# Altium PCB OLDFC_Ver_0_2.PcbDoc
Units mm, origin at the board's own origin, x right, y up, seen from the top; angles counter-clockwise.
Board outline 82 x 58 mm, 2 copper layers (Top Layer, Bottom Layer); 26 components, 24 nets, 116 pads, 23 vias.
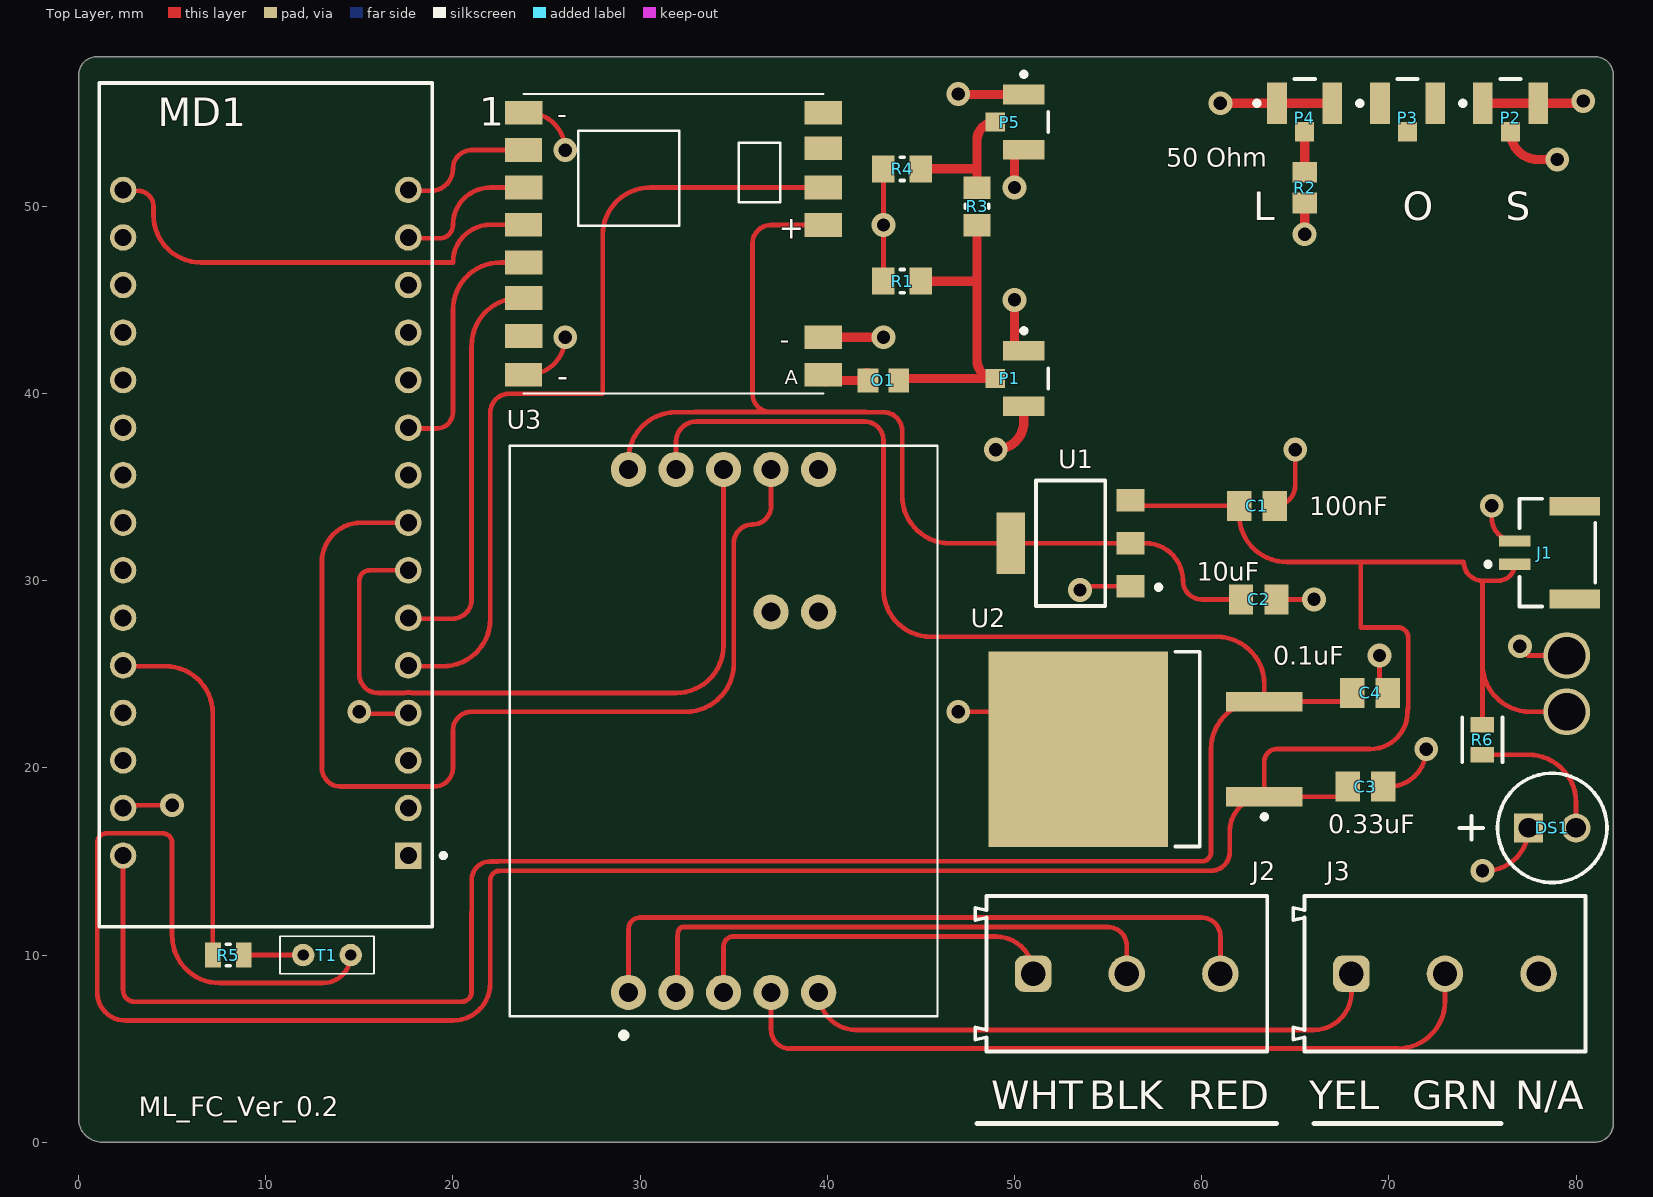
[diagram p0: Top Layer view]
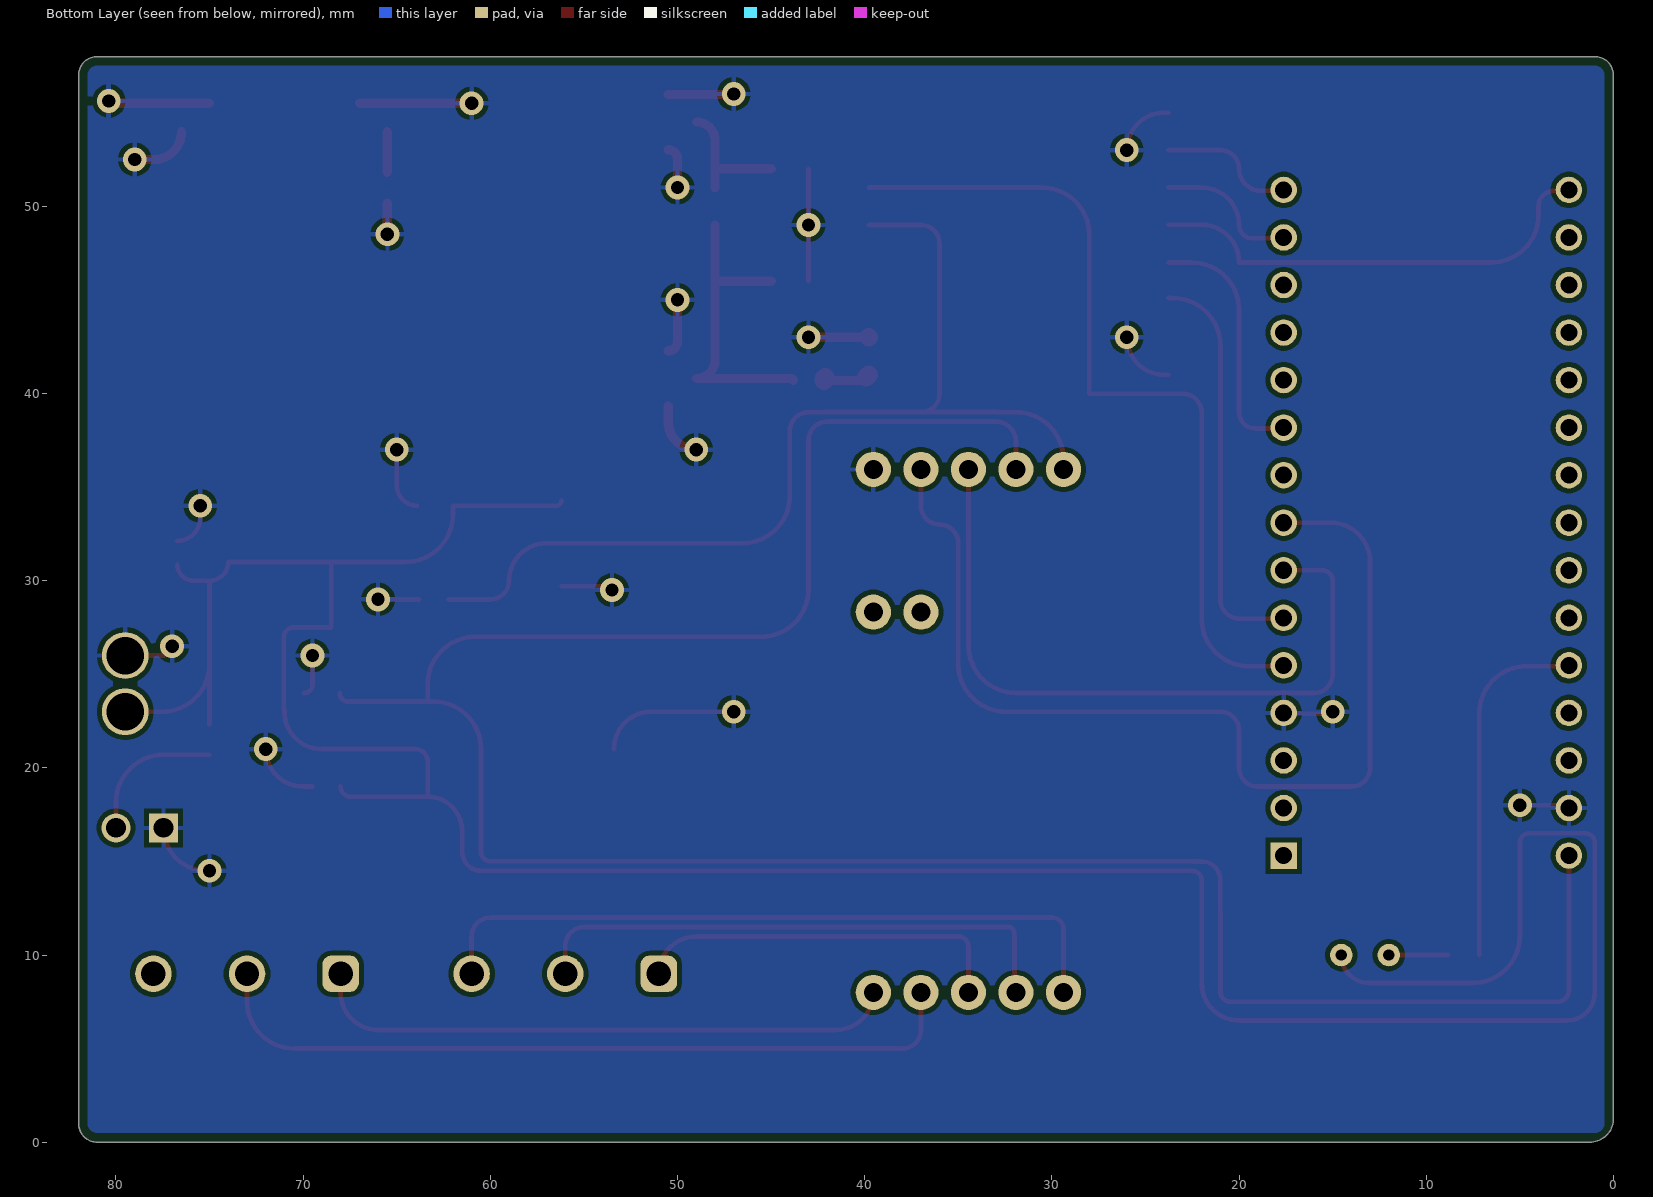
[diagram p1: Bottom Layer view, seen from below]

## Layer stack, top to bottom
Top Solder: solder mask 0.0102, Solder Resist, Dk 3.5
Top Layer: signal copper 0.0356
Dielectric 1: dielectric 0.32, FR-4, Dk 4.8
Bottom Layer: signal copper 0.0356
Bottom Solder: solder mask 0.0102, Solder Resist, Dk 3.5

## Board outline
1.27,0 cw(c1.27,1.27) 0,1.27 0,57 cw(c1,57) 1,58 81,58 cw(c81,57) 82,57 82,1 cw(c81,1) 81,0

## Design rules (kind name [scope] priority, off if disabled: settings)
Clearance [All] p1: gap=0.254 ignorepadtopadclearanceinfootprint=FALSE
MinimumSolderMaskSliver [All] p1: minsoldermaskwidth=0.2
PolygonConnect [All] p1: connectstyle=Relief reliefconductorwidth=0.254 reliefentries=4 polygonreliefangle="90 Angle" airgapwidth=0.254
RoutingVias [All] p1: holewidth=0.711 width=1.27 viastyle="Through Hole" minholewidth=0.711 minwidth=1.27 maxholewidth=0.711 maxwidth=1.27
SolderMaskExpansion [All] p1: expansion=0.102 istentingtop=FALSE
SupplyNets "Schematic Supply Nets" [InNet('GND')] p1: voltage=0.000
SupplyNets "Schematic Supply Nets_3" [InNet('+3.3v')] p2: voltage=0.000
SupplyNets "Schematic Supply Nets_2" [InNet('+12')] p3: voltage=0.000
SupplyNets "Schematic Supply Nets_1" [InNet('+5v')] p4: voltage=0.000
Width [All] p1: maxlimit=1 minlimit=0.254 preferedwidth=0.254 bottomlayer_maxwidth=0.254 minimp=50.000000 maximp=50.000000 favimp=50.000000
29 further rules are at their usual default settings.

## Components (designator, comment, footprint, x,y, rotation, side; value= is the part's Value field where it differs from the comment)
1 "_C2H_RFM95" _C2H_RFM95 34,48 r0 top
C1 "100nF" RCL_M0805 62.95,34 r180 top
C2 "10uF" RCL_M0805 63.05,29 r180 top
C3 "0.33uF" RCL_M0805 68.75,19 r0 top
C4 "0.1uF" RCL_M0805 69,24 r0 top
DS1 "HLMP-3301" AVAG-HLMP-3301-2 77.46,16.792 r0 top
J1 "SM02B-GHS-TB(LF)(SN)" FP-SM02B-GHS-TB_LF_SN-MFG 79,31.5 r90 top
J2 "691213710003" 691213710003 56,9 r0 top
J3 "691213710003" 691213710003 73,9 r0 top
MD1 "A000005" FP-A000005-MFG 10,34.047 r180 top
O1 "0805" RESC2012X06N 43,40.696 r180 top
P1 "U.FL-R-SMT-1(01)" HRS-U.FL-R-SMT-3_V 50.5,40.8 r270 top
P2 "Short" HRS-U.FL-R-SMT-3_V 76.5,55.5 r0 top
P3 "Open" HRS-U.FL-R-SMT-3_V 71,55.5 r0 top
P4 "Load" HRS-U.FL-R-SMT-3_V 65.5,55.5 r0 top
P5 "U.FL-R-SMT-1(01)" HRS-U.FL-R-SMT-3_V 50.5,54.5 r270 top
R1 "RC0805FR-071KL" RESC2013X60X35ML10T20 44,46 r180 top
R2 "0805" RESC2012X06N 65.5,51 r90 top
R3 "RC0805FR-071KL" RESC2013X60X35ML10T20 48,49.996 r270 top
R4 "RC0805FR-071KL" RESC2013X60X35ML10T20 44,52 r0 top
R5 "CRCW08050000Z0EA" RESC2013X50X30LL20T20 8,10 r0 top
R6 "RC0805FR-07100KL" FP-RC0805-0_6-IPC_C 75,21.5 r270 top
T1 "GenericTH" "Generic Two Pin Connector" 14.54,10 r180 top
U1 "LD1117S33CTR" FP-SOT-223-0046067_14-MFG 53,32 r180 top
U2 "L7805CD2T-TR" TO-263_M 57,21 r180 top
U3 "SEN-13879" SPARKFUN_SEN-13879 34.46,21.97 r90 top

## Footprints (in the part's own frame and the unit in brackets; to place one, negate y for a bottom-side part, rotate by r counter-clockwise, add the part's x,y. Pads: shape width x height; smd on the part's side, far side on the other; paste and mask are expansions set on the pad)
691213710003 [mm] "5,00mm - modular - green - Horizontal entry with rising cage clamp -  10,0mm height - 03p"
  rrect50% 1.95x1.95 hole 1.3: 1(-5,0)
  round 1.95 hole 1.3: 2(0,0) 3(5,0)
  silkscreen extent -8.1,-4.15 7.5,4.15, body extent -8.1,-4.15 7.5,4.15, height 10.05
_C2H_RFM95 [mm]
  rect 2x1.27 smd: ANT(5.777,-7) DIO0(5.777,3) DIO1(5.78,5.095) DIO2(5.78,7) DIO5(-10.225,-4.936) GND(5.777,-5) GND1(-10.222,7) GND2(-10.23,-7) MISO(-10.23,5) MOSI(-10.225,3) NSS(-10.222,-1) RST(-10.222,-2.905) SCK(-10.23,1.012) VDD(5.777,1)
  silkscreen extent -10.23,-8 5.78,8
AVAG-HLMP-3301-2 [mm] "THD, 2-Leads, Body Dia 5.85mm"
  rect 1.55x1.55 hole 1.05: 1(0,0)
  round 1.55 hole 1.05: 2(2.54,0)
  silkscreen extent -3.68,-2.92 4.19,2.92
FP-A000005-MFG [mil]
  rect 55.67x55.67 hole 35.98 paste-99999 mask+0: 1(-300,737.5)
  round 55.67 hole 35.98 paste-99999 mask+0: 2(-300,637.5) 3(-300,537.5) 4(-300,437.5) 5(-300,337.5) 6(-300,237.5) 7(-300,137.5) 8(-300,37.5) 9(-300,-62.5) 10(-300,-162.5) 11(-300,-262.5) 12(-300,-362.5) 13(-300,-462.5) 14(-300,-562.5) 15(-300,-662.5) 16(300,-662.5) 17(300,-562.5) 18(300,-462.5) 19(300,-362.5) 20(300,-262.5) 21(300,-162.5) 22(300,-62.5) 23(300,37.5) 24(300,137.5) 25(300,237.5) 26(300,337.5) 27(300,437.5) 28(300,537.5) 29(300,637.5) 30(300,737.5)
  silkscreen extent -379,-888 350,888, body extent -354,-891 354,891, height 10
FP-RC0805-0_6-IPC_C [mm]
  rect 0.808x1.262 smd paste+0 mask+0: 1(-0.802,0) 2(0.802,0)
  silkscreen extent -1.21,-1.07 1.21,1.07, body extent -1.31,-0.77 1.31,0.77, height 0.25
FP-SM02B-GHS-TB_LF_SN-MFG [mm]
  rect 0.6x1.7 smd paste+0 mask+0: 1(-0.625,2.275) 2(0.625,2.275)
  rect 1x2.7 smd paste+0 mask+0: 3(-2.475,-0.925) 4(2.475,-0.925)
  silkscreen extent -2.88,-2.02 2.88,3.82, body extent -3.08,-2.37 3.08,3.22, height 0.25
FP-SOT-223-0046067_14-MFG [mm]
  rect 1.5x1.2 smd paste+0 mask+0: 1(-3.2,2.3) 2(-3.2,0) 3(-3.2,-2.3)
  rect 1.5x3.3 smd paste+0 mask+0: 4(3.2,0)
  silkscreen extent -4.83,-3.35 1.85,3.35, body extent -4.05,-3.45 4.05,3.45, height 0.25
"Generic Two Pin Connector" [mm]
  round 1.2 hole 0.6: 1(0,0) 2(2.54,0)
  silkscreen extent -1.23,-1 3.77,1
HRS-U.FL-R-SMT-3_V [mm] "SMT, 3-Leads, Body 2.6x2.6mm"
  rect 1.05x2.2 smd: 1(-1.475,0) 2(1.475,0)
  rect 1x1.05 smd: 3(0,-1.525)
  silkscreen extent -2.67,-0.12 0.55,1.3, body extent -1.3,-1.3 1.3,1.3, height 1.25
RCL_M0805 [mm]
  rect 1.3x1.6 smd: 1(-0.95,0) 2(0.95,0)
RESC2012X06N [mm] "Chip Resistor, 2-Leads, Body 2.00x1.25mm, IPC Medium Density"
  rect 1.1x1.3 smd: 1(-0.825,0) 2(0.825,0)
  body extent -1,-0.63 1,0.63, height 0.6
RESC2013X50X30LL20T20 [mm] "Chip Resistor, 2-Leads, Body 2.00x1.25mm, IPC High Density"
  rect 0.85x1.35 smd: 1(-0.825,0) 2(0.825,0)
  silkscreen extent -0.1,-0.58 0.1,0.58, body extent -1.1,-0.72 1.1,0.72, height 0.5
RESC2013X60X35ML10T20 [mm] "Chip Resistor, 2-Leads, Body 2.1x1.35mm, IPC Low Density"
  rect 1.2x1.45 smd: 1(-1,0) 2(1,0)
  silkscreen extent -0.1,-0.63 0.1,0.63, body extent -1.05,-0.68 1.05,0.67, height 0.6
SPARKFUN_SEN-13879 [mil]
  round 74 hole 40: 1(-550,200) 2(-550,100) 3(-550,0) 4(-550,-100) 5(-550,-200) 6(550,-200) 7(550,-100) 8(550,0) 9(550,100) 10(550,200) 11(250,-100) 12(250,-200)
  silkscreen extent -646,-450 600,450
TO-263_M [mm] "D2-PAK, 4-Leads, Body 9.2x10.2mm, Pitch 2.54mm, Lead Span 15.4mm, IPC Low Density"
  rect 4.1x1.05 smd: 1(-6.35,2.54) 3(-6.35,-2.54)
  rect 9.6x10.45 smd: 4(3.6,0)
  silkscreen extent -6.48,-5.2 -1.6,5.2, body extent -2.9,-5.2 6.45,5.2, height 4.6

## Part data
C1 C2 C3 C4: library part RCL_R-EU_M0805, Package=RCL_M0805, DeviceName=M0805, DeviceSetName=RCL_R-EU_, GateName_1=G$1, LibraryName=AmbaSat-1v1-01-NO-solar, SymbolName_1=RCL_R-EU
DS1: library part CMP-2000-06411-1, "T-1 3/4 (5 mm) Diffused LED Lamp, 1.9 V, -40 to 100 degC, 2-Pin THD, RoHS, Bulk", Emitting Color=Red, Forward Current=25mA, Forward Voltage=2.4V, Manufacturer=Avago, Operating Temp Range=-40Cto100C, Operating Temperature Classification=Industrial, Package Description="2-Pin Through Hole LED, Dia 5.85 mm", Package Type=T-13/4, Power Dissipation=85W, Reverse Voltage=5V, Test Current (It)=10mA, Chip Material=GaP, Datasheet URL=http://www.avagotech.com/docs/AV02-1558EN, Datasheet Version=03/2015, DELETED=Compliant, Dominant Wave Length=626nm, High Brightness=No, Lens Dimensions=5.08x5.08x8.3mm, Lens Type=ColoredDiffused, Lum Intensity=5.4mcd, Luminous Intensity=5.4mcd, Main Category=StandardLED, Manufacturer URL=http://www.avagotech.com/, Mounting=ThroughHole, Mounting Technology=ThroughHole, Number of  Elements=1, Package Reference=HLMP-3301, Packaging=TapeandReel, Peak Wavelength=635nm, Pin Count=2, Product Depth (mm)=6.1mm, Product Height (mm)=9.19mm, Product Length (mm)=6.1mm, Rad Hardened=No, Shape Type=Circular, Type=Uni-Color, Viewing Angle=60deg
J1: library part CMP-2000-07076-2, "CONN HEADER SMD R/A 2POS 1.25MM", Color=Natural, Current Rating=1A, Package Quantity=2500, Voltage Rating=50V, Connector Type="Outer Shroud Contact", Contact Material=Bronze, Contact Plating=Tin, Contact Type="Male Pin", Fastening Type=Latch, Housing Color=Natural, Housing Material=Nylon, Lead Free="Lead Free", Mount="Surface Mount", Number of Contacts=2, Number of Positions=2, Number of Rows=1, Orientation="Right Angle", Packaging="Tape and Reel", Pitch=0.049inch, Series=GH, Termination=Solder
J2 J3: library part CMP-1502-02527-2, Color=Green, Current=10A, Max Operating Temperature=105°C, Min Operating Temperature=-40°C, Voltage=300V, Connector Type="PCB, Terminal Block", Contact Material=Brass, Contact Plating=Tin, Height=10mm, Housing Material=Nylon, Lead Pitch=5mm, Length=8.3mm, Mount="Through Hole", NexarPartId=8917719, Number of Contacts=3, Number of Levels=1, Number of Pins=3, Number of Positions Per Level=3, Packaging=Box, Pitch=5.0038mm, Plating="Brass, Steel", REACH SVHC=Unknown, RoHS=Compliant, Stripping Length=-7mm, Termination=Screw, Width=15.6mm, Wire Gauge (Max)=26AWG, Wire Gauge (Min)=16AWG, Wire/Cable Gauge=16AWG
MD1: library part CMP-189986-000002-1, "ARDUINO NANO ATMEGA328 EVAL BRD", Operating Supply Voltage=12V, Package Quantity=50, Core Architecture=AVR, Data Bus Width=8b, Evaluation Kit=Yes, Height=0.25inch, Interface=I2C, Length=7inch, Number of Bits=8, Packaging=Bulk, REACH SVHC="No SVHC", Series="AVR® ATmega", Weight=0.358383oz, Width=5inch
P1 P2 P3 P4 P5: library part CMP-2000-05153-1, "Ultra Small Coaxial Connector, 6 GHz, -40 to 90 degC, 3-Pin SMD, RoHS, Bulk", Dielectric Material=LiquidCrystalPolymer(LCP), Frequency - Max=6GHz, Housing Color=Silver, Manufacturer="Hirose Electric", Operating Temperature=-40degC~90degC, Package Description="3-Pin Surface Mount Device, Body 2.6 x 2.6 mm", Package Reference=U.FL-R-SMT, Standard Package=100, Body Finish=Silver, Body Material=PhosphorBronze, Category=Connectors,Interconnects, Center Contact Material=PhosphorBronze, Center Contact Plating=Gold, Connector Style=U.FL, Connector Type=Jack,MalePin, Contact Termination=Solder, Datasheet URL=https://datasheet.ciiva.com/26945/getdatasheetpartid-475239-26945414.pdf, Datasheet Version=Feb-09, Dynamic Catalog=U.FLSeries, Family=CoaxialConnectors(RF), Fastening Type=Snap-On, Featured Product=HiroseU.FLSeries, Impedance=50Ohm, Manufacturer URL=https://www.hirose.com, Minimum Quantity=UltraMiniatureCoaxial, Mounting Type=SurfaceMount, Online Catalog=U.FLSeries, Other Names="H122041 / U.FL-R-SMT-1(01)-ND", Packaging=Bulk, Quantity Available=Bulk, Series=U.FL, Shield Termination=Solder, Unit PriceUSD=U.FL
R1 R3 R4: library part CMP-2100-03671-1, "Chip Resistor, 1 KOhm, +/- 1%, 125 mW, -55 to 155 degC, 0805 (2012 Metric), RoHS, Tape and Reel", Case Code (Imperial)=0805, Case Code (Metric)=2012, Manufacturer=Yageo, Max Operating Temperature=155degC, Max Power Dissipation=125mW, Min Operating Temperature=-55degC, Package Description="2-Pin Surface Mounted Device, Body 2 x 1.25 mm", Package Quantity=1, Resistance=1KOhm, Temperature Coefficient=100ppm/degreesC, Tolerance=1%, Voltage Rating=150V, Case/Package=0805, Composition=ThickFilm, Datasheet URL=http://www.yageo.com/NewPortal/yageodocoutput?fileName=/pdf/R-Chip/PYu-RC_Group_51_RoHS_L_5.pdf, Datasheet Version="Rev. 5, 10/2016", Depth=1.25mm, Height=0.024inch, Lead Free=LeadFree, Length=0.079inch, Manufacturer URL=http://www.yageo.com/, Military Standard=Not, Number of Pins=2, Number of Terminations=2, Package Reference=0805, Packaging=TapeandReel, Power Rating=125mW, REACH SVHC=Unknown, RoHSCompliant=true, Termination=SMD/SMT, Voltage Rating (DC)=150V, Width=0.049inch
R5: library part CMP-2001-04896-1, Manufacturer="Vishay Dale", Part Number=CRCW08050000Z0EA
R6: library part CMP-2100-03668-5, "RES 100K OHM 1% 1/8W 0805", Case Code (Imperial)=0805, Case Code (Metric)=2012, Max Operating Temperature=155°C, Max Power Dissipation=125mW, Min Operating Temperature=-55°C, Package Quantity=1, Resistance=100kR, Resistance Tolerance=1%, Resistor Type="Thick Film", Temperature Coefficient=100ppm/°C, Voltage Rating=150V, Case/Package=0805, Construction=Rectangular, Depth=1.25mm, Features="Moisture Resistant", Height=0.024inch, Lead Free="Lead Free", Lead Pitch=0.4mm, Length=0.079inch, Military Standard=Not, Number of Pins=2, Number of Terminations=2, Packaging="Tape and Reel", Power Rating=125mW, RoHS Compliant=Yes, Series=RC, Size Code=0805, Technology="THICK FILM", Termination=SMD/SMT, Tolerance=1%, Voltage Rating (DC)=150V, Width=0.049inch
T1: library part "Generic Through Hole"
U1: library part CMP-0244-00307-2, "IC REG LINEAR 3.3V 800MA SOT223", Case/Package=SOT-223, Dropout Voltage=1.1V, Input Bias Current=5mA, Max Input Voltage=15V, Max Operating Temperature=125°C, Max Output Current=1.3A, Max Output Voltage=3.3V, Max Power Dissipation=12W, Min Input Voltage=5.3V, Min Operating Temperature=-40°C, Output Current=950mA, Output Voltage Accuracy=1%, Package Quantity=1, Quiescent Current=10mA, Accuracy=1%, Contact Plating=Tin, Height=1.8mm, Lead Free="Lead Free", Length=6.5mm, Max Supply Voltage=15V, Min Output Voltage=3.3V, Min Supply Voltage=3.3V, Mount="Surface Mount", Nominal Output Voltage=3.3V, Number of Outputs=1, Number of Pins=4, Number of Regulators=1, Number of Terminals=4, Output Type=Fixed, Output Voltage=3.3V, Packaging="Tape and Reel", Polarity=Positive, Power Dissipation=12W, Radiation Hardening=No, REACH SVHC="No SVHC", Termination=SMD/SMT, Weight=0.01lb, Width=3.5mm
U2: library part CMP-0244-00213-1, "Positive Voltage Regulator, 3-Pin D2PAK, Tape and Reel", ComponentLink1Description="Manufacturer URL", ComponentLink1URL=http://www.st.com, ComponentLink2Description=Datasheet, ComponentLink2URL=http://www.st.com/internet/com/TECHNICAL_RESOURCES/TECHNICAL_LITERATURE/DATASHEET/CD00000444.pdf, DatasheetVersion=16/11/2011, PackageDescription="3-Pin Transistor Outline Package 2.54 mm Pitch, 15.4 mm Lead Span (D2PAK)", PackageReference=TO-263, PackageVersion=2011
U3: "Load Cell Amp Hx711", Package=None, Availability=Unavailable, MP=SEN-13879, Price=None
1: DeviceSetName=_C2H_RFM95, GateName_1=G$1, LibraryName=AmbaSat-1v1-01-NO-solar, Package=_C2H_RFM95, SymbolName_1=_C2H_RFM95

## Free pads (board coordinates)
  round 2.5 hole 2: 4(79.5,26) 5(79.5,23)

## Via types
v1: diameter 1.27, hole 0.711, Top Layer to Bottom Layer, 23 vias

## Nets (pads, with @x,y where several pads share a name; then routed paths per layer and width w, separated by ;. In a path a pad name is that pad's centre, name@x,y a point inside that pad or via, vN(x,y) a via of type N, cw(c..) or ccw(c..) an arc to the next point about the centre after c; other vN are vias at no path point)
+3.3v: 1.VDD C2.2 U1.2 U1.4 U3.10 | length 55.8
  Top Layer w0.254: U3.10 29.38,36.46 cw(c31.92,36.46) 31.92,39 32.829,39 ccw(c32.829,39.254) 32.853,39.001 cw(c33,37.42) 33,39.008 36.874,39.008 ; 1.VDD 37,49 ccw(c37,48) 36,48 36,40 ccw(c37,40) 36.874,39.008 ; C2.2@62.25,29 60,29 cw(c60,30) 59,30 ccw(c57,30) 57,32 U1.2 U1.4 46.54,32 cw(c46.54,34.54) 44,34.54 44,38 ccw(c43,38) 43,39 42.168,39 cw(c42.168,39.254) 42.144,39.001 ccw(c42,37.5) 42,39.008 36.874,39.008
+5v: C4.1 MD1.30 U2.3 U3.9 | length 133.4
  Top Layer w0.254: MD1.30 2.38,8.12 ccw(c3,8.12) 2.871,7.514 ccw(c2.924,7.762) 2.923,7.508 20.528,7.508 ccw(c20.527,7.762) 20.587,7.515 ccw(c20.46,8.04) 21,8.04 21,12.31 cw(c21.254,12.31) 21.001,12.329 ccw(c17.96,12.54) 21.008,12.54 21.008,14.11 cw(c21.262,14.109) 21.011,14.146 cw(c22,14) 22,15 22.39,15 ccw(c22.39,15.254) 22.427,15.003 cw(c22.5,14.5) 22.5,15.008 60.063,15.008 ccw(c60.062,15.262) 60.126,15.016 ccw(c60,15.5) 60.5,15.5 60.5,21 cw(c63.04,21) 63.04,23.54 U2.3 ; U3.9 31.92,37.42 cw(c33,37.42) 33,38.5 42,38.5 cw(c42,37.5) 43,37.5 43,29.54 ccw(c45.54,29.54) 45.54,27 60.81,27 cw(c60.81,24.46) 63.35,24.46 U2.3 ; C4.1 cw(c67.59,24) 67.59,23.54 U2.3
+12: C1.2 C3.1 J1.1 pad.5 R6.1 T1.1 U1.3 U2.1 | length 165.9
  Top Layer w0.254: T1.1 cw(c13.04,10) 13.04,8.5 7.54,8.5 cw(c7.54,11.04) 5,11.04 5,16 ccw(c4.5,16) 4.5,16.5 1.5,16.5 ccw(c1.5,16) 1,16 1,8 ccw(c2.5,8) 2.5,6.5 20,6.5 ccw(c20,8.5) 22,8.5 22,14 cw(c22.5,14) 22.386,14.487 cw(c22.443,14.239) 22.43,14.493 ccw(c22.39,15.254) 22.486,14.498 ; 22.486,14.498 cw(c22.517,14.246) 22.517,14.5 60.5,14.5 ccw(c60.5,15.5) 61.5,15.5 61.5,16.61 cw(c63.35,16.61) U2.1 ; U1.3 ccw(c56.5,34.3) 56.5,34 C1.2 62,33.54 ccw(c64.54,33.54) 64.54,31 68.5,31 ; C3.1@68,19 cw(c67.46,19) 67.46,18.46 U2.1 ; R6.1 75,25.54 ; J1.1 cw(c75.85,30.875) 75.85,30 75,30 ; pad.5 77.54,23 cw(c77.54,25.54) 75,25.54 ; U2.1 63.35,20.35 cw(c64,20.35) 64,21 69,21 ccw(c69,23) 71,23 71.027,23.198 ccw(c70.65,23.25) 71.031,23.25 71.031,26.969 ccw(c70.5,26.969) 70.5,27.5 68.5,27.5 68.5,31 ; 68.5,31 74,31 ccw(c75,31) 75,30 ; 75,25.54 75,30
ANT: 1.ANT O1.2 | length 3
  Top Layer w0.5: 1.ANT ccw(c40.082,41) 40.082,40.696 O1.2
  Top Layer w1: 1.ANT 1.ANT@39.912,40.865 ; O1.2@42.106,40.865 42.175,40.796 O1.2
BLK: J2.2 U3.2 | length 29.5
  Top Layer w0.254: U3.2 ccw(c31.92,8.08) 32,8.08 32,11 cw(c33,11) 32.053,11.321 cw(c32.293,11.238) 32.292,11.492 55,11.492 cw(c55,10.492) 56,10.492 J2.2
CLK: MD1.8 U3.7 | length 55.5
  Top Layer w0.254: MD1.8 15.094,33.094 ccw(c15.094,31) 13,31 13,20 ccw(c14,20) 14,19 19,19 ccw(c19,20) 20,20 20,22 cw(c21,22) 21,23 32.46,23 ccw(c32.46,25.54) 35,25.54 35,32 cw(c36,32) 36,33 ccw(c36,34) 37,34 U3.7
CS: 1.NSS MD1.10 | length 13.6
  Top Layer w0.254: MD1.10@17.62,38.128 19.128,38.128 ccw(c19.128,39) 20,39 20,44.46 cw(c22.54,44.46) 22.54,47 1.NSS
DAT: MD1.7 U3.8 | length 38.8
  Top Layer w0.254: MD1.7 15.554,30.554 ccw(c15.554,30) 15,30 15,25 ccw(c16,25) 16,24 17.378,24 ccw(c17.377,24.254) 17.422,24.004 cw(c17.62,22.934) 17.818,24.004 ccw(c17.863,24.254) 17.862,24 31.92,24 ccw(c31.92,26.54) 34.46,26.54 U3.8
DIO0: 1.DIO0 MD1.5 | length 45.1
  Top Layer w0.254: MD1.5@17.62,25.428 19.46,25.428 ccw(c19.46,27.968) 22,27.968 22,38.984 cw(c23,38.984) 23,39.984 24.77,39.984 ccw(c24.77,40.365) 24.773,39.984 28,40 28,48.46 cw(c30.54,48.46) 30.54,51 1.DIO0
GND: 1.GND 1.GND1 1.GND2 C1.1 C2.1 C3.2 C4.2 DS1.1 J1.2 MD1.4 MD1.29 P1.1 P1.2 P2.1 P2.2 P2.3 P4.1 P4.2 P5.1 P5.2 pad.4 R1.2 R2.1 R4.1 U1.1 U2.4 U3.6 | length 81
  Top Layer w0.254: MD1.29@2.38,17.808 cw(c2.573,17.808) 2.573,18 v1(5,18) ; v1(15,23) ccw(c15.112,23) 15.112,22.888 MD1.4@17.62,22.888 ; 1.GND2 24,41 ccw(c24,43) v1(26,43) ; 1.GND1 24,55 cw(c24,53) v1(26,53) ; R1.2 v1(43,49) R4.1 ; v1(47,23) 51.4,23 cw(c51.4,21) U2.4 ; v1(53.5,29.5) cw(c53.7,29.5) 53.7,29.7 U1.1 ; C2.1@63.8,29 v1(66,29) ; C1.1 ccw(c63.9,35.1) 65,35.1 v1(65,37) ; C3.2@69.5,19 70,19 ccw(c70,21) v1(72,21) ; v1(69.5,26) 69.5,24.45 ccw(c69.95,24.45) C4.2 ; v1(75,14.5) 75.168,14.5 ccw(c75.168,16.792) DS1.1 ; v1(75.5,34) 75.5,33.35 ccw(c76.725,33.35) J1.2 ; v1(77,26.5) ccw(c77.5,26.5) 77.5,26 pad.4
  Top Layer w0.5: 1.GND v1(43,43) ; v1(47,56) ccw(c47.025,56) 47.025,55.975 P5.1 ; v1(49,37) ccw(c49,38.5) 50.5,38.5 P1.2 ; v1(50,45) 50,42.775 ccw(c50.5,42.775) P1.1 ; v1(50,51) 50,52.525 cw(c50.5,52.525) P5.2 ; v1(61,55.5) P4.1 P4.2 ; v1(65.5,48.5) R2.1 ; P2.1 P2.2 80.259,55.5 ccw(c80.259,55.627) v1(80.386,55.627) ; P2.3 ccw(c77.975,53.975) 77.975,52.5 v1(79,52.5)
GRN: J3.2 U3.4 | length 41.5
  Top Layer w0.254: U3.4 37,6 ccw(c38,6) 38,5 70.46,5 ccw(c70.46,7.54) 73,7.54 J3.2
MISO: 1.MISO MD1.15 | length 7.4
  Top Layer w0.254: MD1.15@17.62,50.828 18.828,50.828 ccw(c18.828,52) 20,52 cw(c21,52) 21,53 1.MISO
MOSI: 1.MOSI MD1.14 | length 7.7
  Top Layer w0.254: MD1.14@17.62,48.288 19.288,48.288 ccw(c19.288,49) 20,49 cw(c22,49) 22,51 1.MOSI
NetDS1_2: DS1.2 R6.2 | length 7.8
  Top Layer w0.254: R6.2 77.46,20.698 cw(c77.46,18.158) 80,18.158 DS1.2
NetMD1_26: MD1.26 R5.1 | length 19.1
  Top Layer w0.254: MD1.26@2.38,25.428 4.635,25.428 cw(c4.635,22.888) 7.175,22.888 R5.1
NetO1_1: O1.1 P1.3 R1.1 R3.2 | length 17
  Top Layer w0.5: O1.1 cw(c43.929,40.696) 43.929,40.8 P1.3 cw(c48.975,41.775) 48,41.775 48,46 ; R1.1 48,46 ; R3.2 48,46
NetP4_3: P4.3 R2.2 | length 2.2
  Top Layer w0.5: R2.2 P4.3
NetP5_3: P5.3 R3.1 R4.2 | length 7.1
  Top Layer w0.5: R4.2 48,52 ; R3.1 48,52 ; P5.3 ccw(c48.975,53.525) 48,53.525 48,52
NetR5_2: R5.2 T1.2 | length 3.2
  Top Layer w0.254: R5.2 T1.2
RED: J2.3 U3.1 | length 37.9
  Top Layer w0.254: U3.1 29.38,11.38 cw(c30,11.38) 30,12 60,12 cw(c60,11) 61,11 J2.3
RST: 1.RST MD1.6 | length 21.8
  Top Layer w0.254: MD1.6@17.62,27.968 19.968,27.968 ccw(c19.968,29) 21,29 21,42.555 cw(c23.54,42.555) 23.54,45.095 1.RST
SCK: 1.SCK MD1.16 | length 24.9
  Top Layer w0.254: MD1.16@2.38,50.828 3.173,50.828 cw(c3.173,50) 4,50 4,49.54 ccw(c6.54,49.54) 6.54,47 20,47 cw(c22.012,47) 22.012,49.012 1.SCK
WHT: J2.1 U3.3 | length 20.4
  Top Layer w0.254: U3.3 34.46,10.46 cw(c35,10.46) 34.823,10.97 cw(c34.906,10.73) 34.905,10.984 49.016,10.984 cw(c49.016,9) J2.1
YEL: J3.1 U3.5 | length 31.7
  Top Layer w0.254: U3.5 ccw(c41.54,8) 41.54,6 66,6 ccw(c66,8) 68,8 J3.1
pads on no net: 1.DIO1 1.DIO2 1.DIO5 J1.3 J1.4 J3.3 MD1.1 MD1.2 MD1.3 MD1.9 MD1.11 MD1.12 MD1.13 MD1.17 MD1.18 MD1.19 MD1.20 MD1.21 MD1.22 MD1.23 MD1.24 MD1.25 MD1.27 MD1.28 P3.1 P3.2 P3.3 U3.11 U3.12

## Polygon pours and split planes (outlines as drawn)
GND on Bottom Layer "GND_L02_P000" (solid, pour order 0): 0.5,57 cw(c1,57) 1,57.5 81,57.5 cw(c81,57) 81.5,57 81.5,1 cw(c81,1) 81,0.5 1,0.5 cw(c1,1) 0.5,1

## Silkscreen, mask and mechanical layers (free items; w line width, h text height)
Top Overlay:
  lines w0.254: 48,1 64,1 ; 66,1 76,1
  text "50 Ohm" at 58.1,52.1 h1
  text "L" at 62.754,49.254 h1.52
  text "O" at 70.754,49.254 h1.52
  text "S" at 76.254,49.254 h1.52
  text "WHT" at 48.754,1.754 h1.52
  text "BLK" at 54.004,1.754 h1.52
  text "RED" at 59.254,1.754 h1.52
  text "YEL" at 65.754,1.754 h1.52
  text "GRN" at 71.254,1.754 h1.52
  text "N/A" at 76.754,1.754 h1.52
  text "ML_FC_Ver_0.2" at 3.204,1.375 h1.02

## Text inside footprints (layer, text, board x,y; h text height)
1: Top Overlay "+" at 37.402,48.266 h1.19; Top Overlay "A" at 37.732,40.497 h0.76; Top Overlay "-" at 37.465,42.361 h1.08; Top Overlay "-" at 25.58,40.367 h1.19; Top Overlay "-" at 25.567,54.401 h1.08